# Altium PCB Layout-DeepAmbiente.pcbdoc
Units mm, origin at the board's own origin, x right, y up, seen from the top; angles counter-clockwise.
Board outline 126.55 x 101.16 mm, 2 copper layers (Top Layer, Bottom Layer); 108 components, 82 nets, 309 pads, 86 vias.
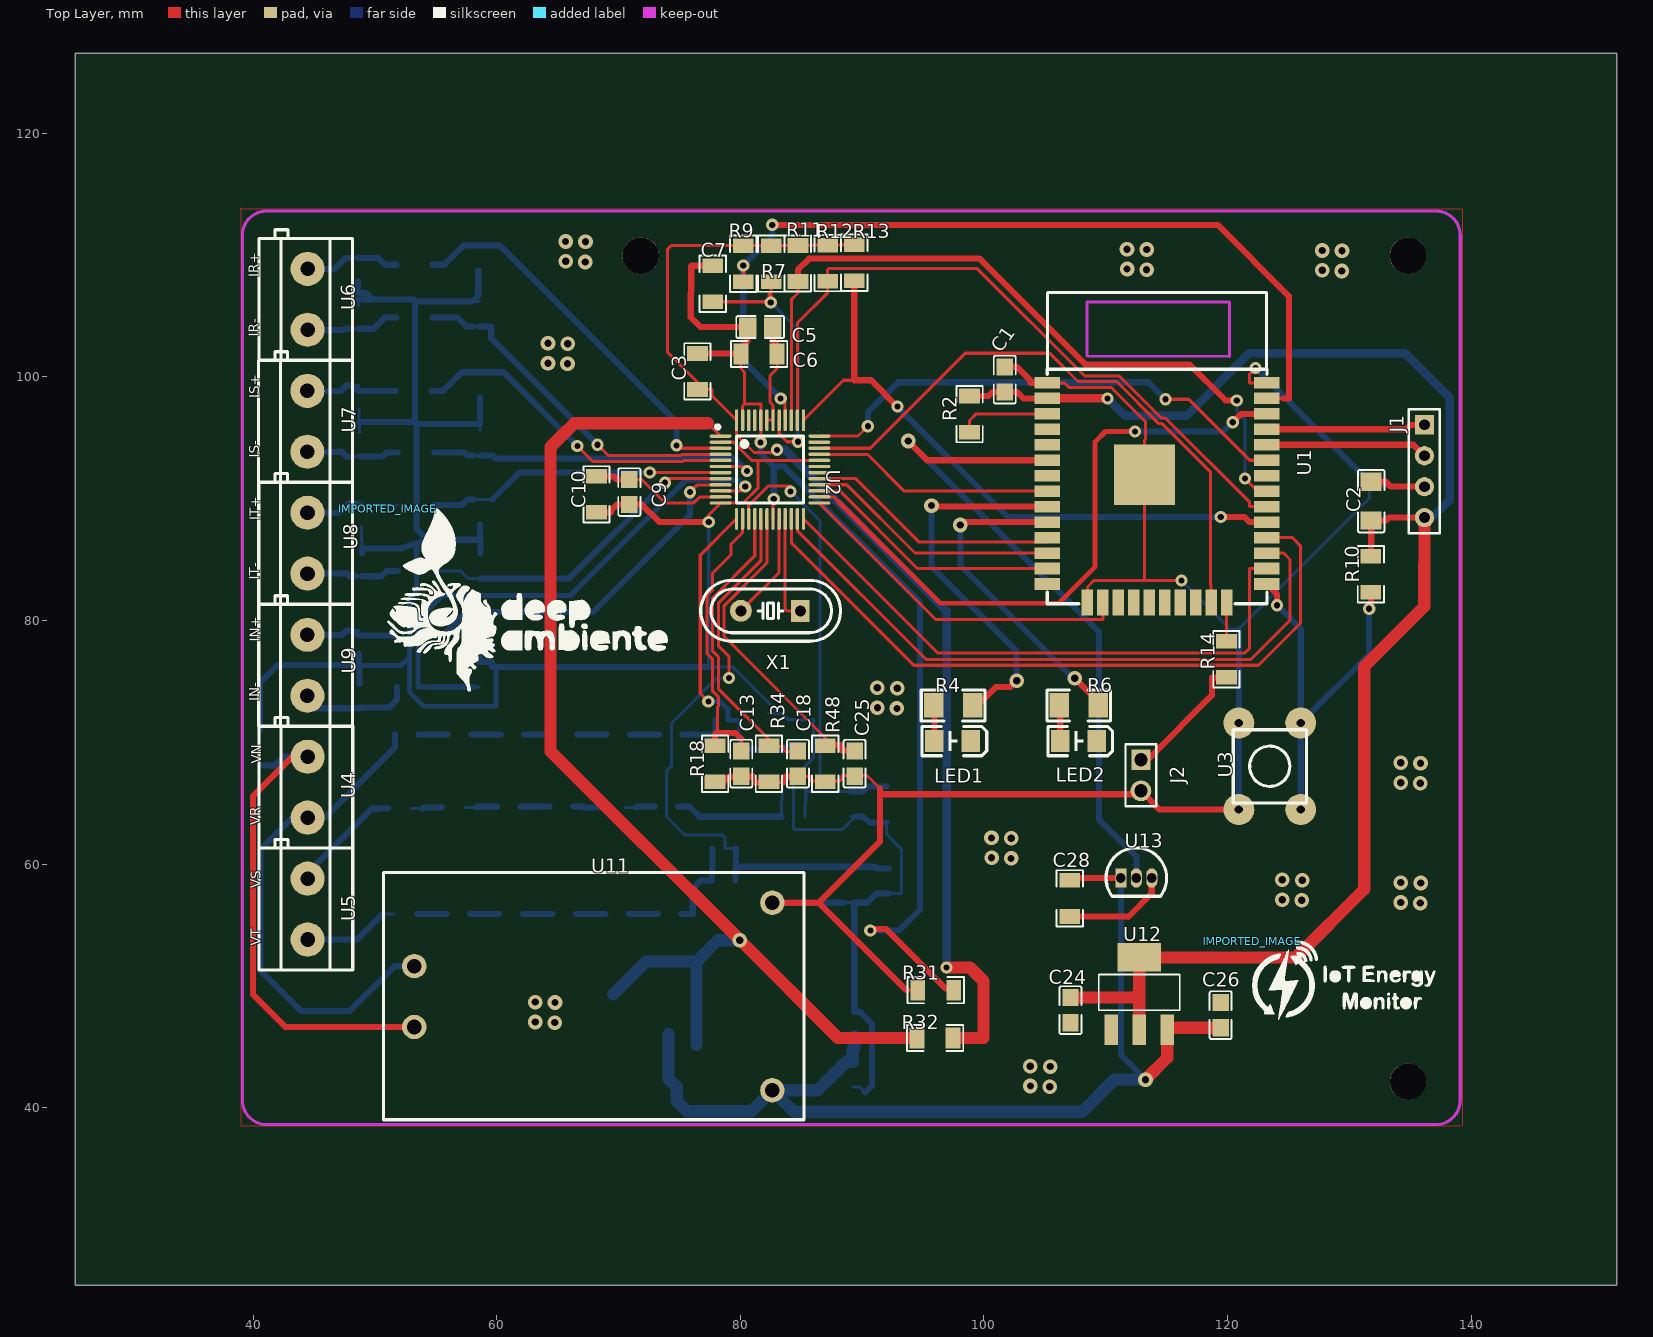
[diagram p0: Top Layer view]
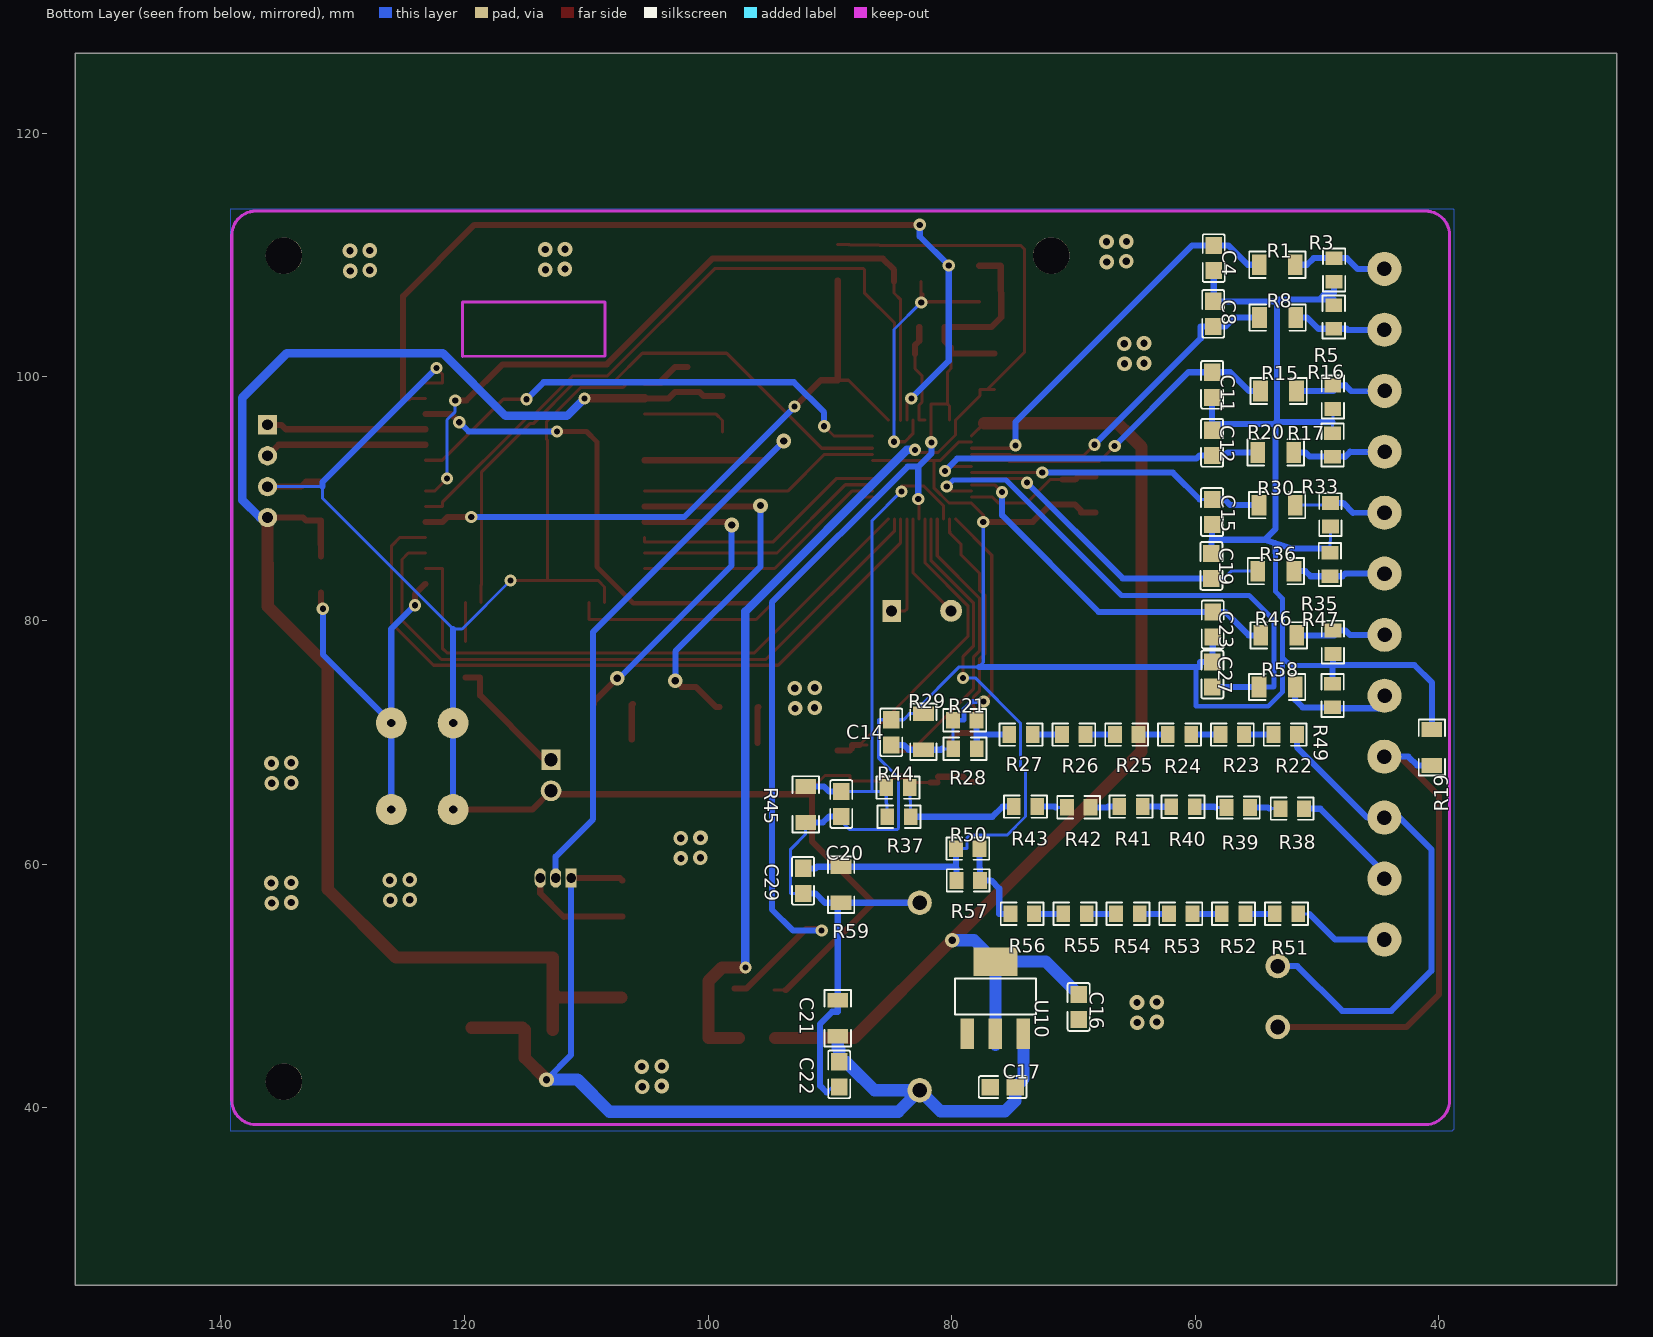
[diagram p1: Bottom Layer view, seen from below]

## Layer stack, top to bottom
Top Layer: signal copper (thickness not stored)
Dielectric: dielectric 0.32, FR-4, Dk 4.8
Bottom Layer: signal copper (thickness not stored)

## Board outline
151.953,25.4 25.4,25.4 25.4,126.561 151.953,126.561

## Components (designator, comment, footprint, x,y, rotation, side; value= is the part's Value field where it differs from the comment)
C1 "22uF" C0805#1 101.709,99.77 r270 top
C2 "100nF" C1206 131.798,89.793 r270 top
C3 "100nF" R1206#1 76.477,100.44 r90 top
C4 "22nF" C0805#2 58.486,109.747 r270 bottom
C5 "10uF" C0805#3 81.633,104.088 r180 top
C6 "100nF" R1206#1 81.537,101.87 r180 top
C7 "100nF" R1206#1 77.737,107.641 r270 top
C8 "22nF" C0805#2 58.529,105.17 r270 bottom
C9 "10uF" C0805#1 70.886,90.534 r90 top
C10 "100nF" R1206#1 68.194,90.352 r90 top
C11 "22nF" C0805#2 58.618,99.343 r270 bottom
C12 "22nF" C0805#2 58.616,94.576 r270 bottom
C13 "22nF" C0805#1 80.081,68.236 r270 top
C14 "22nF" C0805#2 84.963,70.814 r90 bottom
C15 "22nF" C0805#2 58.616,88.899 r270 bottom
C16 "100nF" C0805#2 69.573,48.261 r90 bottom
C17 "100nF" C0805#2 75.809,41.683 r0 bottom
C18 "22nF" C0805#1 84.732,68.236 r270 top
C19 "22nF" C0805#2 58.682,84.474 r270 bottom
C20 "22nF" C0805#2 89.063,64.926 r270 bottom
C21 "100nF" R1206#2 89.355,47.337 r90 bottom
C22 "22uF" C0805#2 89.235,42.729 r270 bottom
C23 "22nF" C0805#2 58.567,79.671 r270 bottom
C24 "100nF" C0805#1 107.109,48 r270 top
C25 "22nF" C0805#1 89.383,68.236 r270 top
C26 "100nF" C0805#1 119.436,47.591 r270 top
C27 "22nF" C0805#2 58.59,75.556 r270 bottom
C28 "100nF" R1206#1 107.048,57.177 r90 top
C29 "22nF" C0805#2 92.202,58.617 r270 bottom
IMPORTED_IMAGE "IMPORTED_IMAGE" IMPORTED_IMAGE 51.06,89.187 r0 top
IMPORTED_IMAGE "IMPORTED_IMAGE" IMPORTED_IMAGE 122.048,53.674 r0 top
J1 "HDR-M-2.54_1x4" HDR-M-2.54_1X4 136.167,92.249 r270 top
J2 "LED" HDR-M-2.54_1X2 112.895,67.278 r270 top
LED1 "1206B" LED1206-R-RD 97.429,70.085 r180 top
LED2 "1206B" LED1206-R-RD 107.765,70.085 r180 top
R1 "1k" R1206#2 53.259,109.201 r0 bottom
R2 "10k" R1206#1 98.821,96.938 r270 top
R3 "6.8" R0805 48.603,108.774 r270 bottom
R4 "220" 1206 97.465,73.024 r0 top
R5 "6.8" R0805 48.633,104.911 r270 bottom
R6 "220" 1206 107.787,73.024 r0 top
R7 "10K" R1206#1 82.532,109.292 r270 top
R8 "1k" R1206#2 53.241,104.865 r0 bottom
R9 "10K" R1206#1 80.241,109.287 r270 top
R10 "10k" R1206#1 131.77,83.786 r90 top
R11 "10K" R1206#1 84.729,109.305 r270 top
R12 "10K" R1206#1 87.17,109.333 r270 top
R13 "10K" R1206#1 89.357,109.371 r270 top
R14 "220R" R1206#1 119.913,76.806 r90 top
R15 "1k" R1206#2 53.162,98.838 r0 bottom
R16 "6.8" R0805 48.704,98.332 r270 bottom
R17 "6.8" R0805 48.727,94.408 r270 bottom
R18 "1k" R1206#1 77.93,68.236 r270 top
R19 "0R" R1206#2 40.576,69.564 r270 bottom
R20 "1k" R1206#2 53.388,93.791 r0 bottom
R21 "120k" R0805 78.925,71.799 r0 bottom
R22 "270k" R0805 52.619,70.626 r0 bottom
R23 "270k" R0805 56.957,70.626 r0 bottom
R24 "270k" R0805 61.295,70.626 r0 bottom
R25 "270k" R0805 65.631,70.626 r0 bottom
R26 "270k" R0805 69.969,70.626 r0 bottom
R27 "270k" R0805 74.308,70.626 r0 bottom
R28 "120k" R0805 78.908,69.46 r0 bottom
R29 "1k" R1206#2 82.319,70.862 r270 bottom
R30 "1k" R1206#2 53.282,89.465 r0 bottom
R31 "0R" R1206#1 96.05,49.643 r180 top
R32 "0R" R1206#1 95.989,45.714 r0 top
R33 "6.8" R0805 48.905,88.68 r270 bottom
R34 "1k" R1206#1 82.347,68.236 r270 top
R35 "6.8" R0805 48.946,84.591 r270 bottom
R36 "1k" R1206#2 53.381,84.047 r0 bottom
R37 "120k" R0805 84.331,63.88 r0 bottom
R38 "270k" R0805 52.047,64.545 r0 bottom
R39 "270k" R0805 56.467,64.639 r0 bottom
R40 "270k" R0805 61.003,64.7 r0 bottom
R41 "270k" R0805 65.281,64.72 r0 bottom
R42 "270k" R0805 69.573,64.654 r0 bottom
R43 "270k" R0805 73.939,64.72 r0 bottom
R44 "120k" R0805 84.407,66.275 r0 bottom
R45 "1k" R1206#2 91.986,64.888 r90 bottom
R46 "1k" R1206#2 53.142,78.772 r0 bottom
R47 "6.8" R0805 48.697,78.21 r270 bottom
R48 "1k" R1206#1 86.97,68.236 r270 top
R49 "6.8" R0805 48.727,73.829 r270 bottom
R50 "120k" R0805 78.674,61.261 r0 bottom
R51 "270k" R0805 52.512,55.909 r0 bottom
R52 "270k" R0805 56.853,55.909 r0 bottom
R53 "270k" R0805 61.194,55.909 r0 bottom
R54 "270k" R0805 65.532,55.909 r0 bottom
R55 "270k" R0805 69.873,55.909 r0 bottom
R56 "270k" R0805 74.214,55.909 r0 bottom
R57 "120k" R0805 78.649,58.65 r0 bottom
R58 "1k" R1206#2 53.282,74.532 r0 bottom
R59 "1k" R1206#2 89.08,58.297 r90 bottom
U1 "ESP32-WROOM-32D" WIFIM-SMD_39P-L25.5-W18.0-P1.27-BL 114.214,90.486 r270 top
U2 "ATM90E36A" TQFP-48_L7.0-W7.0-P0.50-LS9.0-BL 82.436,92.386 r270 top
U3 "PUSHBUTTON" "PUSH BUTTON 4 PIN DIP" 123.469,68.025 r270 top
U4 "KF301-5.0-2P" CONN-TH_P5.00_KF301-5.0-2P 44.478,66.31 r90 top
U5 "KF301-5.0-2P" CONN-TH_P5.00_KF301-5.0-2P 44.475,56.298 r90 top
U6 "KF301-5.0-2P" CONN-TH_P5.00_KF301-5.0-2P 44.473,106.364 r90 top
U7 "KF301-5.0-2P" CONN-TH_P5.00_KF301-5.0-2P 44.45,96.346 r90 top
U8 "KF301-5.0-2P" CONN-TH_P5.00_KF301-5.0-2P 44.46,86.341 r90 top
U9 "KF301-5.0-2P" CONN-TH_P5.00_KF301-5.0-2P 44.458,76.316 r90 top
U10 "AMS1117-3.3" SOT-223-3_L6.5-W3.4-P2.30-LS7.0-BR#1 76.414,49.023 r90 bottom
U11 "HLK-PM03" PWRM-TH_HLK-PM03 67.934,49.118 r0 top
U12 "AMS1117-3.3" SOT-223-3_L6.5-W3.4-P2.30-LS7.0-BR#2 112.754,49.359 r270 top
U13 "LM35DZ" TO-92-3_L4.9-W3.7-P1.27-L 112.512,58.851 r0 top
X1 "16.384MHz" HC-49US_L11.5-W4.5-P4.88 82.484,80.786 r180 top

## Footprints (in the part's own frame and the unit in brackets; to place one, negate y for a bottom-side part, rotate by r counter-clockwise, add the part's x,y. Pads: shape width x height; smd on the part's side, far side on the other; paste and mask are expansions set on the pad)
1206 [mm]
  rect 1.6x2 smd: 1(-1.6,0) 2(1.6,0)
  silkscreen extent -2.61,-1.27 2.62,1.27
C0805#1 [mm]
  rect 1.41x1.35 smd: 1(-1.03,0) 2(1.03,0)
  silkscreen extent -1.96,-0.9 1.96,0.9
C0805#2 [mm]
  rect 1.41x1.35 smd: 1(1.03,0) 2(-1.03,0)
  silkscreen extent -1.96,-0.9 1.96,0.9
C0805#3 [mm]
  rect 1.41x1.6 smd: 1(-1.03,0) 2(1.03,0)
  silkscreen extent -1.96,-0.9 1.96,0.9
C1206 [mm]
  rect 1.485x1.728 smd: 1(-1.593,0) 2(1.593,0)
  silkscreen extent -2.56,-1.09 2.56,1.09
CONN-TH_P5.00_KF301-5.0-2P [mm]
  round 2.8 hole 1.2: 1(-2.5,0) 2(2.5,0)
  silkscreen extent -5,-3.7 5.71,4
HC-49US_L11.5-W4.5-P4.88 [mm]
  rect 1.5x1.8 hole 0.9: 1(-2.44,0)
  round 1.8 hole 0.9: 2(2.44,0)
  silkscreen extent -5.74,-2.5 5.74,2.5
HDR-M-2.54_1X2 [mm]
  rect 1.7x1.575 hole 1.1: 1(-1.27,0)
  round 1.7 hole 1.1: 2(1.27,0)
  silkscreen extent -2.54,-1.27 2.54,1.27
HDR-M-2.54_1X4 [mil]
  rect 62x62 hole 35: 1(-150,0)
  round 62 hole 35: 2(-50,0) 3(50,0) 4(150,0)
  silkscreen extent -200,-50 200,50
IMPORTED_IMAGE [mm]
  silkscreen extent -0.03,-15 22.97,0
LED1206-R-RD [mm]
  rect 1.5x1.8 smd: 1(1.5,0) 2(-1.5,0)
  silkscreen extent -2.8,-1.2 2.5,1.2
"PUSH BUTTON 4 PIN DIP" [mil]
  round 100 hole 27: 1(-140,100) 2(140,100) 3(-140,-100) 4(140,-100)
  silkscreen extent -118,-118 118,118
PWRM-TH_HLK-PM03 [mm]
  round 2 hole 1.2: 1(-14.7,2.5) 2(-14.7,-2.5) 3(14.7,7.7) 4(14.7,-7.7)
  silkscreen extent -17.24,-10.12 17.3,10.2
R0805 [mm]
  rect 1.133x1.377 smd: 1(0.966,0) 2(-0.966,0)
  silkscreen extent -1.76,-0.92 1.76,0.92
R1206#1 [mm]
  rect 1.208x1.701 smd: 1(-1.479,0) 2(1.479,0)
  silkscreen extent -2.31,-1.08 2.31,1.08
R1206#2 [mm]
  rect 1.208x1.701 smd: 1(1.479,0) 2(-1.479,0)
  silkscreen extent -2.31,-1.08 2.31,1.08
SOT-223-3_L6.5-W3.4-P2.30-LS7.0-BR#1 [mm]
  rect 2.5x1.1 smd: 1(-2.97,2.3) 2(-2.97,0) 3(-2.97,-2.3)
  rect 2.34x3.6 smd: 4(2.97,0)
  silkscreen extent -1.37,-3.33 1.57,3.33
SOT-223-3_L6.5-W3.4-P2.30-LS7.0-BR#2 [mm]
  rect 2.5x1.1 smd: 1(2.97,-2.3) 2(2.97,0) 3(2.97,2.3)
  rect 2.34x3.6 smd: 4(-2.97,0)
  silkscreen extent -1.57,-3.33 1.37,3.33
TO-92-3_L4.9-W3.7-P1.27-L [mm]
  rect 0.9x1.6 hole 0.8: 1(-1.27,0)
  oval 0.9x1.6 hole 0.8: 2(0,0) 3(1.27,0)
  silkscreen extent -2.48,-1.5 2.48,2.48
TQFP-48_L7.0-W7.0-P0.50-LS9.0-BL [mm]
  oval 0.28x1.8 smd: 1(-2.75,-4.05) 2(-2.25,-4.05) 3(-1.75,-4.05) 4(-1.25,-4.05) 5(-0.75,-4.05) 6(-0.25,-4.05) 7(0.25,-4.05) 8(0.75,-4.05) 9(1.25,-4.05) 10(1.75,-4.05) 11(2.25,-4.05) 12(2.75,-4.05) 25(2.75,4.05) 26(2.25,4.05) 27(1.75,4.05) 28(1.25,4.05) 29(0.75,4.05) 30(0.25,4.05) 31(-0.25,4.05) 32(-0.75,4.05) 33(-1.25,4.05) 34(-1.75,4.05) 35(-2.25,4.05) 36(-2.75,4.05)
  oval 1.8x0.28 smd: 13(4.05,-2.75) 14(4.05,-2.25) 15(4.05,-1.75) 16(4.05,-1.25) 17(4.05,-0.75) 18(4.05,-0.25) 19(4.05,0.25) 20(4.05,0.75) 21(4.05,1.25) 22(4.05,1.75) 23(4.05,2.25) 24(4.05,2.75) 37(-4.05,2.75) 38(-4.05,2.25) 39(-4.05,1.75) 40(-4.05,1.25) 41(-4.05,0.75) 42(-4.05,0.25) 43(-4.05,-0.25) 44(-4.05,-0.75) 45(-4.05,-1.25) 46(-4.05,-1.75) 47(-4.05,-2.25) 48(-4.05,-2.75)
  silkscreen extent -3.65,-4.45 2.75,2.75
WIFIM-SMD_39P-L25.5-W18.0-P1.27-BL [mm]
  rect 0.95x2.1 smd: 1(-9.015,-9) 2(-7.745,-9) 3(-6.475,-9) 4(-5.205,-9) 5(-3.935,-9) 6(-2.665,-9) 7(-1.395,-9) 8(-0.125,-9) 9(1.145,-9) 10(2.415,-9) 11(3.685,-9) 12(4.955,-9) 13(6.225,-9) 14(7.495,-9) 25(7.495,9) 26(6.225,9) 27(4.955,9) 28(3.685,9) 29(2.415,9) 30(1.145,9) 31(-0.125,9) 32(-1.395,9) 33(-2.665,9) 34(-3.935,9) 35(-5.205,9) 36(-6.475,9) 37(-7.745,9) 38(-9.015,9)
  rect 2.1x0.95 smd: 15(9.015,-5.715) 16(9.015,-4.445) 17(9.015,-3.175) 18(9.015,-1.905) 19(9.015,-0.635) 20(9.015,0.635) 21(9.015,1.905) 22(9.015,3.175) 23(9.015,4.445) 24(9.015,5.715)
  rect 5x5 smd: 39(-1.472,-1.017)
  silkscreen extent -16.44,-9.02 9.12,9.02

## Free pads (board coordinates)
  round 3 hole 3 unplated: ""(71.828,109.949) ""(134.823,42.13) ""(134.823,109.948)

## Via types
v1: diameter 1.2, hole 0.6, Top Layer to Bottom Layer, tented both sides, 51 vias
v2: diameter 1, hole 0.5, Top Layer to Bottom Layer, tented both sides, 35 vias

## Nets (pads, with @x,y where several pads share a name; then routed paths per layer and width w, separated by ;. In a path a pad name is that pad's centre, name@x,y a point inside that pad or via, vN(x,y) a via of type N, cw(c..) or ccw(c..) an arc to the next point about the centre after c; other vN are vias at no path point)
5V: C17.2 C21.2 C22.2 C26.2 C28.2 U10.3 U11.4 U12.3 U13.1 | length 87.8
  Top Layer w0.5: C28.2 107.243,58.851 U13.1
  Top Layer w1: v1(113.266,42.297) 115.053,44.084 115.053,46.389 115.225,46.561 C26.2
  Bottom Layer w0.5: U13.1 111.242,44.322 v1(113.266,42.297)
  Bottom Layer w1: U10.3@74.113,46.053 74.113,42.348 C17.2 74.779,40.543 75.623,39.699 80.914,39.699 U11.4 ; C21.2 89.355,44.909 89.235,44.789 C22.2 88.673,43.759 88.215,43.302 86.333,41.42 U11.4 ; v1(113.266,42.297) 110.726,42.297 108.092,39.663 84.391,39.663 U11.4
+3.3V: C1.2 C2.2 C24.1 J1.4 R2.1 R10.2 U1.2 U12.2 U12.4 | length 127.6
  Top Layer w0.5: R2.1 100.366,98.416 100.689,98.74 C1.2 102.729,98.74 103.238,98.231 U1.2 ; R10.2 131.77,86.213 131.798,86.241 131.798,88.2 133.007,88.2 133.246,88.439 J1.4
  Top Layer w0.7: U1.2 v2(110.144,98.231)
  Top Layer w1: C24.1 112.343,49.03 112.753,49.44 ; U12.2 U12.4 ; U12.4@112.753,52.328 125.628,52.328 131.224,57.923 131.224,76.222 136.154,81.152 J1.4
  Bottom Layer w0.7: v2@110.145,98.231 111.59,96.785 116.627,96.785 121.775,101.934 134.597,101.934 138.247,98.284 138.247,89.884 136.802,88.439 J1.4
A3.3V: C16.1 R32.1 U2.1 U10.2 U10.4 | length 104.8
  Top Layer w0.254: 77.328,96.194 U2.1
  Top Layer w1: 75.953,57.784 79.947,53.791 v1(79.947,53.735) ; 77.328,96.194 66.378,96.194 65.405,95.221 64.425,94.24 64.425,69.257 v1(79.947,53.735) ; R32.1 88.019,45.714 79.997,53.735 v1(79.947,53.735)
  Bottom Layer w1: C16.1 72.275,51.993 U10.4 78.155,53.735 v1(79.947,53.735) ; U10.2@76.413,45.16 U10.4@76.413,51.993
CF1: U1.16 U2.25 | length 28.6
  Top Layer w0.25: U2.25@86.486,89.636 96.048,80.074 109.769,80.074 U1.16
CF2: U1.36 U2.26 | length 52.8
  Top Layer w0.254: U2.26 87.699,90.136 87.699,90.1 88.016,89.783
  Top Layer w0.4: 88.016,89.783 96.411,81.406 106.131,81.406 109.131,84.405 109.131,94.659 109.985,95.513 v2@112.413,95.513
  Top Layer w0.5: v2(120.427,96.272) 121.117,96.961 U1.36
  Bottom Layer w0.5: v2(112.413,95.513) 119.669,95.513 v2(120.427,96.272)
CF3: U1.13 U2.27 | length 21.4
  Top Layer w0.25: U2.27@86.484,90.636 88.156,90.636 94.531,84.261 U1.13@105.214,84.261
CF4: U1.12 U2.28 | length 21.1
  Top Layer w0.25: U2.28@86.484,91.136 88.732,91.136 94.338,85.531 U1.12@105.214,85.531
CLK: R12.2 U1.30 U2.38 | length 57.8
  Top Layer w0.25: U2.38 84.686,104.418 87.17,106.903 87.17,107.516 R12.2 87.17,108.805 87.241,108.876 99.461,108.876 108.256,100.081 111.094,100.081 114.552,96.623 114.885,96.623 121.816,89.692 121.816,89.341 U1.30
CS: R13.2 U1.29 U2.37 | length 52.4
  Top Layer w0.25: U2.37 88.468,99.719 89.357,99.719
  Top Layer w0.5: R13.2 89.357,99.719 90.738,99.719 v2(92.898,97.559) ; v2(119.445,88.481) 121.407,88.481 121.816,88.071 U1.29
  Bottom Layer w0.5: v2(92.898,97.559) 101.976,88.481 v2(119.445,88.481)
D3.3V: C3.1 R7.1 R9.1 R11.1 R12.1 R13.1 R32.2 U2.48 | length 97.4
  Top Layer w0.25: C3.1 C3.1@77.075,98.962 ; v2(83.017,94.007) 82.799,93.788 81.125,93.788 79.686,95.228 U2.48 77.672,98.449 77.672,98.962 C3.1@77.075,98.962 ; R13.1 88.404,110.85 88.366,110.812 87.768,110.812 R12.1 85.953,110.812 85.925,110.784 85.327,110.784 R11.1 83.74,110.784 83.728,110.771 R7.1 81.337,110.771 81.332,110.766 R9.1 74.31,110.766 74.035,110.49 74.035,102.002 C3.1@77.075,98.962
  Top Layer w1: v2@96.937,51.502 98.867,51.502 99.969,50.4 99.969,45.714 R32.2
  Bottom Layer w0.7: v2(83.017,94.007) 83.67,94.007 96.935,80.741 v2(96.935,51.503)
DGND: C3.2 C5.2 C6.2 C7.1 R31.1 U2.19 U2.44 U2.47 | length 89.4
  Top Layer w0.25: C6.2@80.058,101.919 C6.2 80.058,100.675 80.332,100.4 80.332,97.754 ; U2.47 80.186,97.607 80.332,97.754 ; v2(81.671,94.621) 81.686,94.636 U2.44 ; U2.44@81.686,96.435 81.686,97.753 80.333,97.753 ; U2.19 82.686,89.903 v2(82.746,89.963)
  Top Layer w0.5: C3.2 77.672,101.919 80.058,101.919 80.058,102.397 80.603,102.943 C5.2 79.553,104.088 76.733,104.088 75.933,104.888 75.969,109.094 75.995,109.12 C7.1 ; v2@90.952,54.672 91.958,54.672 96.86,49.77 R31.1@97.809,49.77
  Bottom Layer w0.5: v2(81.671,94.621) 81.671,93.697 82.746,92.622 ; v2(82.746,89.963) 82.746,92.622 ; v2(90.673,54.545) 93.04,54.545 94.76,56.265 94.76,81.484 83.622,92.622 82.746,92.622
DMA: U1.33 U2.36 | length 41.9
  Top Layer w0.25: U2.36@86.486,95.136 89.666,95.136 v2(90.469,95.94) ; v2(114.902,98.157) 116.811,98.157 121.816,93.151 U1.33
  Bottom Layer w0.5: v2@90.47,95.94 90.47,97.072 92.951,99.554 113.505,99.554 v2(114.902,98.157)
FR: R22.2 U4.1 U11.1 | length 41
  Bottom Layer w0.5: 51.652,69.59 45.873,63.81 43.218,63.81 40.612,61.204 40.612,51.233 43.904,47.941 47.95,47.941 51.629,51.62 U11.1@53.235,51.62 ; 51.653,69.59 R22.2
FS: R38.2 U5.2 | length 9.3
  Bottom Layer w0.5: U5.2@44.475,58.797 44.475,59.29 49.728,64.535 50.168,64.535 ; 50.167,64.545 R38.2
FT: R51.2 U5.1 | length 7.9
  Bottom Layer w0.25: 50.632,55.909 R51.2
  Bottom Layer w0.5: U5.1 48.52,53.791 50.632,55.899
GND: C1.1 C2.1 C4.1 C8.2 C9.1 C10.1 C11.1 C12.2 C13.2 C14.1 C15.1 C16.2 C17.1 C18.2 C19.2 C20.1 C21.1 C22.1 C23.1 C24.2 C25.2 C26.1 C27.2 C28.1 C29.1 J1.3 J2.2 LED1.2 LED2.2 R3.1 R5.2 R16.1 R17.2 R18.2 R19.2 R29.2 R31.2 R33.1 R34.2 R35.2 R45.2 R47.1 R48.2 R49.2 R59.2 U1.1 U1.15 U1.38 U1.39 U2.2 U2.12 U2.32 U3.3 U3.4 U10.1 U11.3 U12.1 U13.3 | length 414.5
  Top Layer w0.25: 77.771,89.022 77.409,88.659 ; U2.12@78.384,89.635 80.216,89.635 81.465,90.888 81.465,93.12 80.957,93.12 ; U2.12 77.409,88.659 ; U2.2 79.441,94.636 80.956,93.121 80.972,93.136 U2.32@86.486,93.136 ; C13.2@79.571,67.163 C13.2@80.081,67.163 ; 81.101,67.163 81.101,66.743 81.151,66.693 ; R34.2@81.749,66.693 82.347,66.693 83.542,66.693 ; C18.2@84.732,67.173 85.752,67.173 85.774,67.151 85.774,66.82 86.97,66.82 88.165,66.82 88.362,67.018 88.362,67.269 89.383,67.269 89.893,67.269 90.403,67.269 91.476,66.196 ; 93.622,49.643 R31.2 ; U1.1 106.609,99.501 106.975,99.135 110.438,99.135 113.26,96.314 113.26,94.866 113.197,94.803 U1.39 113.197,90.992 113.197,89.113 113.197,83.269 ; U1.15 108.499,82.75 109.019,83.269 113.197,83.269 ; v2(116.218,83.27) 113.197,83.269 ; v2(122.303,100.716) 121.819,100.232 121.819,99.501 U1.38 ; 77.409,88.659 v2(77.409,88.083) 77.409,88.659
  Top Layer w0.5: C10.1 69.389,88.873 69.389,89.028 69.866,89.504 C9.1 71.907,89.504 73.328,88.083 v2(77.409,88.083) ; R18.2@77.93,66.737 78.635,66.737 79.061,67.163 C13.2@79.571,67.163 ; C13.2@80.081,67.163 81.101,67.163 ; 81.151,66.693 R34.2@81.749,66.693 ; U11.3 86.446,56.82 ; 83.542,66.693 83.542,67.003 83.712,67.173 C18.2@84.732,67.173 ; 91.476,66.196 91.476,61.85 86.446,56.82 ; 91.743,65.729 J2.2@112.738,65.729 ; 93.622,49.643 86.446,56.82 ; C1.1 102.729,100.8 103.819,99.71 103.819,99.501 U1.1 ; C28.1 111.786,55.698 111.834,55.65 113.782,57.598 U13.3 ; J2.2 114.435,64.469 U3.4 ; C2.1 133.007,91.385 133.414,90.979 J1.3
  Bottom Layer w0.25: R5.2 R5.2@48.633,106.333 ; 48.697,76.332 48.727,76.302 ; R16.1 48.704,96.454 48.727,96.431 48.727,96.286 R17.2 ; R33.1 48.905,86.509 48.946,86.469 R35.2 ; 53.302,96.286 53.568,96.286 53.723,96.131 ; C8.2@58.019,106.2 C8.2 ; 58.616,86.62 58.682,86.554 ; C12.2 C12.2@58.616,96.131 ; v2(77.409,88.083) 77.409,76.547 77.771,76.184 79.382,76.184 82.917,72.65 R29.2@82.917,72.341 ; R29.2 R29.2@82.917,72.341 ; R59.2@88.483,56.818 R59.2 R59.2@89.355,56.818 ; C20.1 89.456,63.896 88.404,62.844 84.456,62.844 84.354,62.947 84.354,67.064 86.019,68.73 86.019,71.808 85.983,71.844 C14.1 83.943,71.844 83.514,72.272 83.514,72.341 R29.2@82.917,72.341 ; C22.1 89.798,41.699 90.256,41.242 ; R45.2 91.986,62.46 93.224,61.222 93.224,57.589 93.222,57.587 C29.1 ; v2(116.218,83.27) 120.186,79.302 120.929,79.302 131.673,90.045 131.673,90.979 J1.3
  Bottom Layer w0.4: 48.727,76.303 52.184,76.303 52.852,76.971 52.852,78.028 ; 53.404,85.551 53.404,82.351 52.852,81.799 52.852,78.028 ; 59.611,76.183 59.941,76.183 59.941,72.955 54.016,72.955 52.852,74.116 52.852,78.028
  Bottom Layer w0.5: R19.2@40.576,71.043 40.576,74.908 42.001,76.333 48.697,76.333 ; R3.1 48.603,106.896 49.277,106.896 49.84,106.333 ; R5.2@48.633,106.333 49.84,106.333 ; 48.697,76.332 R47.1 ; R49.2 48.727,76.302 ; 48.727,96.286 53.302,96.286 53.302,106.2 ; R35.2@48.946,85.556 48.946,85.904 52.121,85.904 54.361,86.653 ; 53.404,85.552 53.404,86.297 53.457,86.351 ; 53.724,96.13 53.419,96.13 53.419,87.502 54.3,86.62 ; 53.723,96.131 58.616,96.131 58.616,96.656 58.618,96.658 C11.1 ; 54.301,86.62 58.616,86.62 C15.1 ; C4.1 58.486,106.667 58.019,106.2 57.509,106.2 53.302,106.2 ; C23.1 58.567,77.659 58.59,77.636 C27.2 59.61,76.586 59.61,76.186 59.612,76.184 77.771,76.184 ; C19.2 58.682,86.554 ; U11.3 87.883,56.82 87.885,56.818 R59.2@88.483,56.818 ; 89.355,47.866 C21.1 89.355,56.818 90.413,56.818 91.182,57.587 C29.1 ; 89.355,47.868 89.809,47.868 90.805,46.872 90.805,41.792 90.256,41.241 ; C20.1@89.456,63.896 90.083,63.896 90.57,63.409 R45.2 ; U3.4 U3.3 120.929,79.302 ; v2(122.303,100.716) 131.673,91.346 131.673,90.979 ; 49.84,106.333 53.169,106.333 53.302,106.2
  other v1: 105.418,41.718 103.817,41.769 105.443,43.369 103.81,43.402 64.762,46.981 63.162,47.032 64.788,48.632 63.155,48.665 135.834,56.791 134.234,56.841 126.106,57.012 124.506,57.062 135.86,58.442 134.226,58.475 126.131,58.663 124.498,58.696 102.23,60.458 100.63,60.509 102.255,62.109 100.622,62.142 135.824,66.623 134.224,66.674 135.849,68.274 134.216,68.307 92.857,72.775 91.257,72.826 92.883,74.426 91.249,74.459 65.814,101.07 64.214,101.121 65.839,102.721 64.206,102.754 129.375,108.688 127.775,108.739 113.355,108.8 111.755,108.85 67.259,109.43 65.659,109.48 129.4,110.339 127.767,110.372 113.381,110.451 111.747,110.484 67.285,111.081 65.651,111.114
I1N: C8.1 R8.1 U2.4 | length 29
  Top Layer w0.25: v2(68.28,94.426) 69.179,93.527 75.103,93.527 75.213,93.636 U2.4
  Bottom Layer w0.25: C8.1@58.018,104.14 C8.1
  Bottom Layer w0.5: R8.1 56.782,104.865 57.507,104.14 C8.1@58.018,104.14 ; C8.1 59.552,104.14 59.552,103.154 v2(68.28,94.426)
I1P: C4.2 R1.1 U2.3 | length 32.3
  Top Layer w0.25: v2(74.752,94.374) 74.99,94.136 U2.3
  Bottom Layer w0.5: R1.1 55.689,109.201 57.265,110.777 C4.2 ; C4.2@58.486,110.776 60.279,110.776 74.752,96.303 v2(74.752,94.374)
I2N: C12.1 R20.1 U2.6 | length 28.7
  Top Layer w0.25: U2.6 80.187,92.636 v2(80.561,92.262)
  Bottom Layer w0.25: C12.1@58.104,93.546 C12.1
  Bottom Layer w0.5: R20.1 57.348,93.791 57.593,93.546 C12.1@58.104,93.546 ; C12.1 59.638,93.546 59.903,93.28 79.543,93.28 v2(80.561,92.262)
I2P: C11.2 R15.1 U2.5 | length 27.4
  Top Layer w0.25: v2(66.617,94.319) 67.882,93.054 75.3,93.054 75.382,93.136 U2.5
  Bottom Layer w0.5: R15.1 55.592,98.838 57.128,100.373 C11.2 59.641,100.373 60.563,100.373 v2(66.617,94.319)
I3N: C19.1 R36.1 U2.8 | length 27.2
  Top Layer w0.25: v2(73.815,91.307) 74.144,91.636 U2.8
  Bottom Layer w0.25: R36.1 57.056,84.047 57.659,83.444 58.171,83.444 C19.1
  Bottom Layer w0.5: C19.1 65.952,83.444 v2(73.815,91.307)
I3P: C15.2 R30.1 U2.7 | length 24.7
  Top Layer w0.25: v2(72.567,92.136) U2.7
  Bottom Layer w0.25: C15.2@58.104,89.929 C15.2 59.638,89.929
  Bottom Layer w0.5: R30.1 57.13,89.465 57.593,89.929 C15.2@58.104,89.929 ; 59.638,89.929 61.846,92.136 v2(72.567,92.136)
INN: C27.1 R58.1 U2.10 | length 44.5
  Top Layer w0.25: U2.10 80.035,90.636 v2(80.406,91.007)
  Bottom Layer w0.25: C27.1@58.079,74.526 C27.1
  Bottom Layer w0.4: R58.1 53.568,74.532 53.53,74.57 53.53,79.994 55.581,82.046 66.058,82.046 75.542,91.53 79.883,91.53 v2(80.406,91.007)
  Bottom Layer w0.5: R58.1 57.561,74.532 57.568,74.526 C27.1@58.079,74.526
INP: C23.2 R46.1 U2.9 | length 30
  Top Layer w0.25: v2(75.862,90.527) 76.471,91.136 U2.9
  Bottom Layer w0.25: C23.2@58.056,80.701 C23.2
  Bottom Layer w0.5: R46.1 55.616,78.772 57.545,80.701 C23.2@58.056,80.701 ; C23.2 67.946,80.701 75.862,88.617 v2(75.862,90.527)
J2_1: J2.1 R14.1 | length 10.7
  Top Layer w0.5: J2.1 113.418,68.548 113.606,68.736 118.715,73.846 118.715,75.327 R14.1
NEUTRO: R19.1 U4.2 U11.2 | length 40.7
  Top Layer w0.5: U4.2 43.218,68.81 39.997,65.589 39.997,49.272 42.649,46.62 U11.2@53.236,46.62
  Bottom Layer w0.5: R19.1 41.774,68.085 ; 41.774,68.091 42.499,68.802 U4.2
PM0: U1.8 U2.33 | length 20
  Top Layer w0.25: U2.33@86.486,93.636 90.442,93.636 93.467,90.611 U1.8
PM1: U1.23 U2.34 | length 50.1
  Top Layer w0.25: U2.34@86.486,94.136 90.675,94.136 98.473,101.934 105.398,101.934 107.725,99.607 110.898,99.607 114.356,96.15 114.638,96.15 118.587,92.201 118.587,82.941 118.659,82.869 U1.23
R4_1: LED1.1 R4.1 | length 3
  Top Layer w0.5: R4.1@95.865,72.897 95.929,72.832 LED1.1@95.929,69.953
R6_1: LED2.1 R6.1 | length 3
  Top Layer w0.5: R6.1@106.187,73.153 106.265,73.076 LED2.1@106.265,70.217
R22_1: R22.1 R23.2 | length 2.4
  Bottom Layer w0.5: R22.1 R23.2
R23_1: R23.1 R24.2 | length 2.4
  Bottom Layer w0.5: R23.1 R24.2
R24_1: R24.1 R25.2 | length 2.4
  Bottom Layer w0.5: R24.1 R25.2
R25_1: R25.1 R26.2 | length 2.4
  Bottom Layer w0.5: R25.1 R26.2
R26_1: R26.1 R27.2 | length 2.4
  Bottom Layer w0.5: R26.1 R27.2
R27_1: R21.2 R27.1 R28.2 | length 5.1
  Bottom Layer w0.5: R27.1 77.812,70.626 77.941,70.496 ; R28.2 77.941,70.496 ; R21.2 77.959,70.514 77.941,70.496
R39_2: R38.1 R39.2 | length 2.5
  Bottom Layer w0.25: R38.1 53.927,64.545
  Bottom Layer w0.5: 53.927,64.545 54.021,64.639 R39.2
R40_2: R39.1 R40.2 | length 2.6
  Bottom Layer w0.25: R39.1 58.347,64.639
  Bottom Layer w0.5: 58.347,64.639 58.408,64.7 R40.2
R41_2: R40.1 R41.2 | length 2.4
  Bottom Layer w0.5: R40.1 62.883,64.7 62.904,64.72 R41.2
R42_2: R41.1 R42.2 | length 2.4
  Bottom Layer w0.5: R41.1 67.161,64.72 67.227,64.654 R42.2
R43_2: R42.1 R43.2 | length 2.5
  Bottom Layer w0.25: R42.1 71.453,64.654
  Bottom Layer w0.5: 71.453,64.654 71.519,64.72 R43.2
R44_2: R37.2 R43.1 R44.2 | length 11.2
  Bottom Layer w0.25: R37.2 83.364,65.163 83.44,65.239 R44.2
  Bottom Layer w0.5: R43.1 75.819,64.72 76.66,63.88 R37.2
R52_2: R51.1 R52.2 | length 2.4
  Bottom Layer w0.5: R51.1 R52.2
R53_2: R52.1 R53.2 | length 2.4
  Bottom Layer w0.5: R52.1 R53.2
R54_2: R53.1 R54.2 | length 2.4
  Bottom Layer w0.5: R53.1 R54.2
R55_2: R54.1 R55.2 | length 2.4
  Bottom Layer w0.5: R54.1 R55.2
R56_2: R55.1 R56.2 | length 2.4
  Bottom Layer w0.5: R55.1 R56.2
R57_2: R50.2 R56.1 R57.2 | length 7.5
  Bottom Layer w0.5: R56.1 76.094,55.909 76.094,57.975 76.768,58.65 R57.2 77.682,59.686 77.708,59.711 R50.2
S$176239: 
SDI: R9.2 U1.37 U2.40 | length 74.8
  Top Layer w0.25: R9.2 v2(80.241,109.142) ; v2(83.314,98.232) 83.686,97.86 U2.40 ; U1.37 124.611,98.231
  Top Layer w0.5: v2(82.621,112.48) 119.187,112.48 125.034,106.633 125.034,98.231 124.61,98.231
  Bottom Layer w0.5: v2(82.621,112.48) 82.621,111.521 v2(80.241,109.142) 80.241,101.305 v2(83.314,98.232)
SDO: R11.2 U1.31 U2.39 | length 62.7
  Top Layer w0.25: R11.2@84.729,107.351 R11.2 ; v2(121.432,91.641) 122.462,90.611 U1.31
  Top Layer w0.254: U2.39 84.186,106.331 84.729,106.875 R11.2@84.729,107.351
  Top Layer w0.5: R11.2 84.729,108.777 ; 84.729,108.777 85.651,109.699 99.642,109.699 108.313,101.027 116.865,101.027 119.837,98.055 v2@120.759,98.055
  Bottom Layer w0.25: v2@120.76,98.056 120.76,97.137 121.432,96.466 v2(121.432,91.641)
  other v2: 120.76,98.056
TCN+: R46.2 R47.2 U9.2 | length 8.1
  Bottom Layer w0.25: R47.2@48.179,79.176 R47.2
  Bottom Layer w0.5: U9.2@44.392,78.802 47.3,78.81 47.661,79.165 ; 47.661,79.176 48.179,79.176 48.584,78.772 R46.2
TCN-: R49.1 R58.2 U9.1 | length 9.7
  Bottom Layer w0.5: U9.1@44.45,73.821 44.44,73.816 44.44,72.79 R49.1@48.727,72.79 ; R49.1 51.193,72.863 51.803,73.473 R58.2
TCR+: R1.2 R3.2 U6.2 | length 7.9
  Bottom Layer w0.25: R3.2@48.085,109.74 R3.2
  Bottom Layer w0.5: U6.2@44.465,108.863 46.69,108.858 47.567,109.747 ; 47.567,109.74 R3.2@48.085,109.74 ; R3.2 50.289,109.74 50.829,109.201 R1.2
TCR-: R5.1 R8.2 U6.1 | length 7.7
  Bottom Layer w0.25: R5.1@48.115,103.945 R5.1
  Bottom Layer w0.5: U6.1@44.465,103.847 47.516,103.854 47.597,103.956 ; 47.597,103.945 R5.1@48.115,103.945 ; R5.1 49.89,103.945 50.811,104.865 R8.2
TCS+: R15.2 R16.2 U7.2 | length 8.2
  Bottom Layer w0.25: R16.2@48.187,99.298 R16.2
  Bottom Layer w0.5: U7.2@44.407,98.81 47.216,98.85 47.668,99.308 ; 47.668,99.298 48.187,99.298 48.647,98.838 R15.2
TCS-: R17.1 R20.2 U7.1 | length 7.8
  Bottom Layer w0.25: R17.1@48.209,93.442 R17.1
  Bottom Layer w0.5: U7.1@44.409,93.783 47.287,93.847 47.691,93.44 ; 47.691,93.442 R17.1@48.209,93.442 ; R17.1 50.609,93.442 50.958,93.791 R20.2
TCT+: R30.2 R33.2 U8.2 | length 8.3
  Bottom Layer w0.25: R33.2 48.387,89.646 48.569,89.465 R30.2
  Bottom Layer w0.5: U8.2@44.399,88.805 47.063,88.843 47.869,89.656 ; 47.869,89.646 R33.2@48.387,89.646
TCT-: R35.1 R36.2 U8.1 | length 7.7
  Bottom Layer w0.25: R35.1@48.428,83.625 R35.1
  Bottom Layer w0.5: U8.1@44.458,83.842 47.694,83.839 47.91,83.636 ; 47.91,83.625 R35.1@48.428,83.625 ; R35.1 50.528,83.625 50.951,84.047 R36.2
TEMP: U1.6 U13.2 | length 55.7
  Top Layer w0.5: v1(93.777,94.725) 95.351,93.151 96.291,93.151 U1.6
  Bottom Layer w0.5: v1(93.777,94.725) 109.441,79.061 109.441,63.682 112.512,60.611 U13.2
U1_3: R2.2 U1.3 | length 7.6
  Top Layer w0.25: R2.2 98.821,96.41 99.372,96.961 U1.3
U1_9: R4.2 U1.9 | length 31.4
  Top Layer w0.5: v1(95.692,89.427) 95.778,89.341 U1.9 ; R4.2@99.065,72.897 99.36,72.897 100.998,74.535 102.179,74.535 v1(102.687,75.043)
  Bottom Layer w0.5: v1(95.692,89.427) 95.692,84.449 102.687,77.453 v1(102.687,75.043)
U1_10: R6.2 U1.10 | length 26.7
  Top Layer w0.5: v1(98.062,87.829) 98.304,88.071 U1.10 ; v1(107.452,75.256) 109.387,73.321 R6.2@109.387,73.153
  Bottom Layer w0.5: v1(98.062,87.829) 98.062,84.51 107.315,75.256 v1(107.452,75.256)
U1_24: R14.2 U1.24 | length 3.2
  Top Layer w0.25: R14.2 119.913,80.058 119.929,80.074 U1.24
U1_25: R10.1 U1.25 U3.1 U3.2 | length 32.8
  Top Layer w0.5: U1.25 124.07,82.135 v2(124.07,81.245) ; v2(131.63,80.954) 131.77,81.094 R10.1
  Bottom Layer w0.5: v2(124.07,81.245) 126.009,79.305 U3.1 ; U3.2 U3.1 ; v2(131.63,80.954) 131.63,77.201 U3.1
U1_34: J1.2 U1.34 | length 13.3
  Top Layer w0.5: U1.34 135.264,94.421 J1.2
U1_35: J1.1 U1.35 | length 13.1
  Top Layer w0.5: U1.35 134.664,95.691 135.032,96.059 J1.1
U2_11: C9.2 C10.2 U2.11 | length 11.3
  Top Layer w0.25: C9.2 71.909,91.564 73.818,89.655 76.179,89.655 76.66,90.136 U2.11
  Top Layer w0.5: C10.2 69.598,91.83 69.864,91.564 C9.2
U2_20: U2.20 X1.2 | length 8.9
  Top Layer w0.25: X1.2 83.186,83.928 U2.20
U2_21: U2.21 X1.1 | length 8.7
  Top Layer w0.25: U2.21 83.686,80.927 83.826,80.786 X1.1
U2_41: C7.2 R7.2 U2.41 | length 23.3
  Top Layer w0.25: C7.2 82.449,106.163 v2(82.502,106.11) ; R7.2 82.532,106.978 82.502,106.948 v2(82.502,106.11) ; U2.41 83.186,95.314 83.83,94.67 v2(84.729,94.67) ; v2(82.502,106.11) 82.502,106.655 82.355,106.801 82.355,106.256 v2(82.502,106.11)
  Bottom Layer w0.25: v2(82.502,106.11) 84.729,103.882 v2(84.729,94.67)
U2_42: C5.1 C6.1 U2.42 U2.43 | length 8.6
  Top Layer w0.25: U2.43 U2.42 82.686,97.662 82.431,97.916 82.431,100.088 83.015,100.673 C6.1
  Top Layer w0.5: C5.1@82.663,104.088 82.663,102.94 83.015,102.588 C6.1
V1N: C13.1 R18.1 U2.14 | length 23.6
  Top Layer w0.25: 78.119,70.835 78.119,72.884 78.22,72.984 78.22,73.687 77.725,74.181 77.725,76.809 77.252,77.282 77.252,82.038 77.725,82.512 77.725,83.895 79.249,85.419 79.249,86.267 80.159,87.177 80.159,87.283 80.186,87.31 U2.14 ; C13.1@80.081,69.222 80.081,70.275
  Top Layer w0.5: R18.1@77.93,69.694 77.93,70.645 78.12,70.835 78.199,70.756 79.6,70.756 80.081,70.275
V1P: C14.2 R21.1 R28.1 R29.1 U2.13 | length 28
  Top Layer w0.25: v2(77.372,73.336) 76.71,73.998 76.71,85.361 U2.13
  Bottom Layer w0.25: R28.1 R28.1@80.331,69.46 ; R21.1 79.892,69.899 R28.1@80.331,69.46 ; 80.788,69.46 R28.1@80.331,69.46
  Bottom Layer w0.4: v2(77.372,73.336) 78.355,73.336 78.978,72.713 78.978,71.799 R21.1
  Bottom Layer w0.5: 80.788,69.46 80.864,69.383 R29.1 83.54,69.383 83.941,69.784 C14.2
V2N: C18.1 R34.1 U2.16 | length 25
  Top Layer w0.25: U2.16 81.186,85.302 77.725,81.842 77.725,77.479 78.199,77.005 78.199,74.398 R34.1@82.946,69.651 ; R34.1@82.347,69.651 R34.1@82.946,69.651 ; C18.1@84.732,69.233 83.709,69.233 83.545,69.397 83.545,69.651 R34.1@82.946,69.651
V2P: C20.2 R37.1 R44.1 R45.1 U2.15 | length 40.5
  Top Layer w0.25: U2.15 80.686,89.438 82.287,91.04 84.132,91.04 v2(84.132,90.595)
  Bottom Layer w0.25: v2(84.132,90.595) 86.54,88.188 86.54,65.956 ; R37.1 85.297,64.916 85.373,64.992 R44.1@85.373,65.956 ; R44.1 R44.1@85.373,65.956 ; C20.2 88.04,65.956 86.54,65.956 ; R44.1@85.373,65.956 86.54,65.956
  Bottom Layer w0.5: C20.2 90.085,65.956 90.496,66.367 R45.1
V3N: C25.1 R48.1 U2.18 | length 26.4
  Top Layer w0.25: U2.18 82.186,84.727 78.672,81.213 78.672,78.674 87.568,69.778 R48.1@86.97,69.778
  Top Layer w0.5: R48.1@87.568,69.778 88.167,69.778 88.167,69.522 88.36,69.329 C25.1@89.383,69.329
V3P: C29.2 R50.1 R57.1 R59.1 U2.17 | length 51.5
  Top Layer w0.25: v2(79.06,75.282) 79.06,77.051 78.199,77.912 78.199,81.41 81.686,84.897 U2.17
  Bottom Layer w0.25: v2(79.06,75.282) 78.066,75.282 74.36,71.576 74.36,68.068 73.939,67.647 73.939,63.892 75.46,62.371 78.53,62.371 78.726,62.175 78.726,61.261 R50.1 ; 79.615,59.686 79.64,59.711 79.64,59.775
  Bottom Layer w0.5: R57.1 79.615,59.686 ; R50.1 79.64,59.775 87.882,59.775 R59.1 91.051,59.775 91.18,59.647 C29.2
WR: U1.11 U2.29 | length 21.3
  Top Layer w0.25: U2.29@86.484,91.637 89.479,91.637 94.691,86.425 105.214,86.425 U1.11@105.214,86.801
ZX0: U1.28 U2.22 | length 58.8
  Top Layer w0.25: U2.22@84.186,88.335 84.186,86.379 94.247,76.318 122.55,76.318 125.984,79.752 125.984,86.135 125.319,86.801 U1.28@123.213,86.801
ZX1: U1.27 U2.23 | length 54.3
  Top Layer w0.25: U2.23@84.686,88.335 84.686,87.362 95.255,76.793 121.905,76.793 125.136,80.024 125.136,85.007 124.61,85.531 ; U1.27 124.611,85.531
ZX2: U1.26 U2.24 | length 49.3
  Top Layer w0.25: U2.24@85.187,88.335 96.205,77.316 121.42,77.316 121.816,77.713 121.816,84.261 ; 121.816,84.261 U1.26
pads on no net: U1.4 U1.5 U1.7 U1.14 U1.17 U1.18 U1.19 U1.20 U1.21 U1.22 U1.32 U2.30 U2.31 U2.35 U2.45 U2.46

## Polygon pours and split planes (outlines as drawn)
GND on Bottom Layer (solid): 38.795,113.756 139.229,113.756 139.247,113.774 139.247,38.118 139.229,38.1 38.904,38.1 38.757,38.247 38.757,113.726 38.8,113.769
GND on Top Layer (solid): 86.413,95.518 86.413,95.528 86.429,95.528 86.429,95.518 86.413,95.518
GND on Top Layer (solid): 86.383,95.526 86.383,95.538 86.434,95.538 86.434,95.526 86.383,95.526
GND on Top Layer (solid): 39.068,38.467 39.03,38.505 39.03,113.796 38.966,113.796 39.03,113.861 39.03,113.796 139.233,113.796 139.253,113.775 139.253,38.51 139.21,38.467 39.068,38.467

## Keep-outs
Keep-Out Layer:
  lines w0.254: 39.11,40.609 ccw(c41.11,40.609) 41.11,38.609 ; 39.11,111.609 cw(c41.11,111.609) 41.11,113.609 ; 137.11,38.609 ccw(c137.11,40.609) 139.11,40.609 ; 137.11,113.609 cw(c137.11,111.609) 139.11,111.609

## Silkscreen, mask and mechanical layers (free items; w line width, h text height)
Top Overlay:
  text "IR+" at 40.451,108.185 h0.8 r90
  text "IR-" at 40.448,103.295 h0.8 r90
  text "IS+" at 40.499,98.236 h0.8 r90
  text "IS-" at 40.496,93.346 h0.8 r90
  text "IT+" at 40.524,88.241 h0.8 r90
  text "IT-" at 40.522,83.351 h0.8 r90
  text "IN+" at 40.524,78.233 h0.8 r90
  text "IN-" at 40.522,73.344 h0.8 r90
  text "VN" at 40.651,68.251 h0.8 r90
  text "VR" at 40.585,63.196 h0.8 r90
  text "VS" at 40.641,58.02 h0.8 r90
  text "VT" at 40.621,53.294 h0.8 r90